# Altium PCB Shapeoko Mill.PcbDoc (part 2 of 2)
Units mil, origin at the board's own origin, x right, y up, seen from the top; angles counter-clockwise.
Board outline 6000 x 5000 mil, 2 copper layers (Top Layer, Bottom Layer); 145 components, 165 nets, 634 pads, 190 vias.
Unrouted connection lines stored in the file: 4.
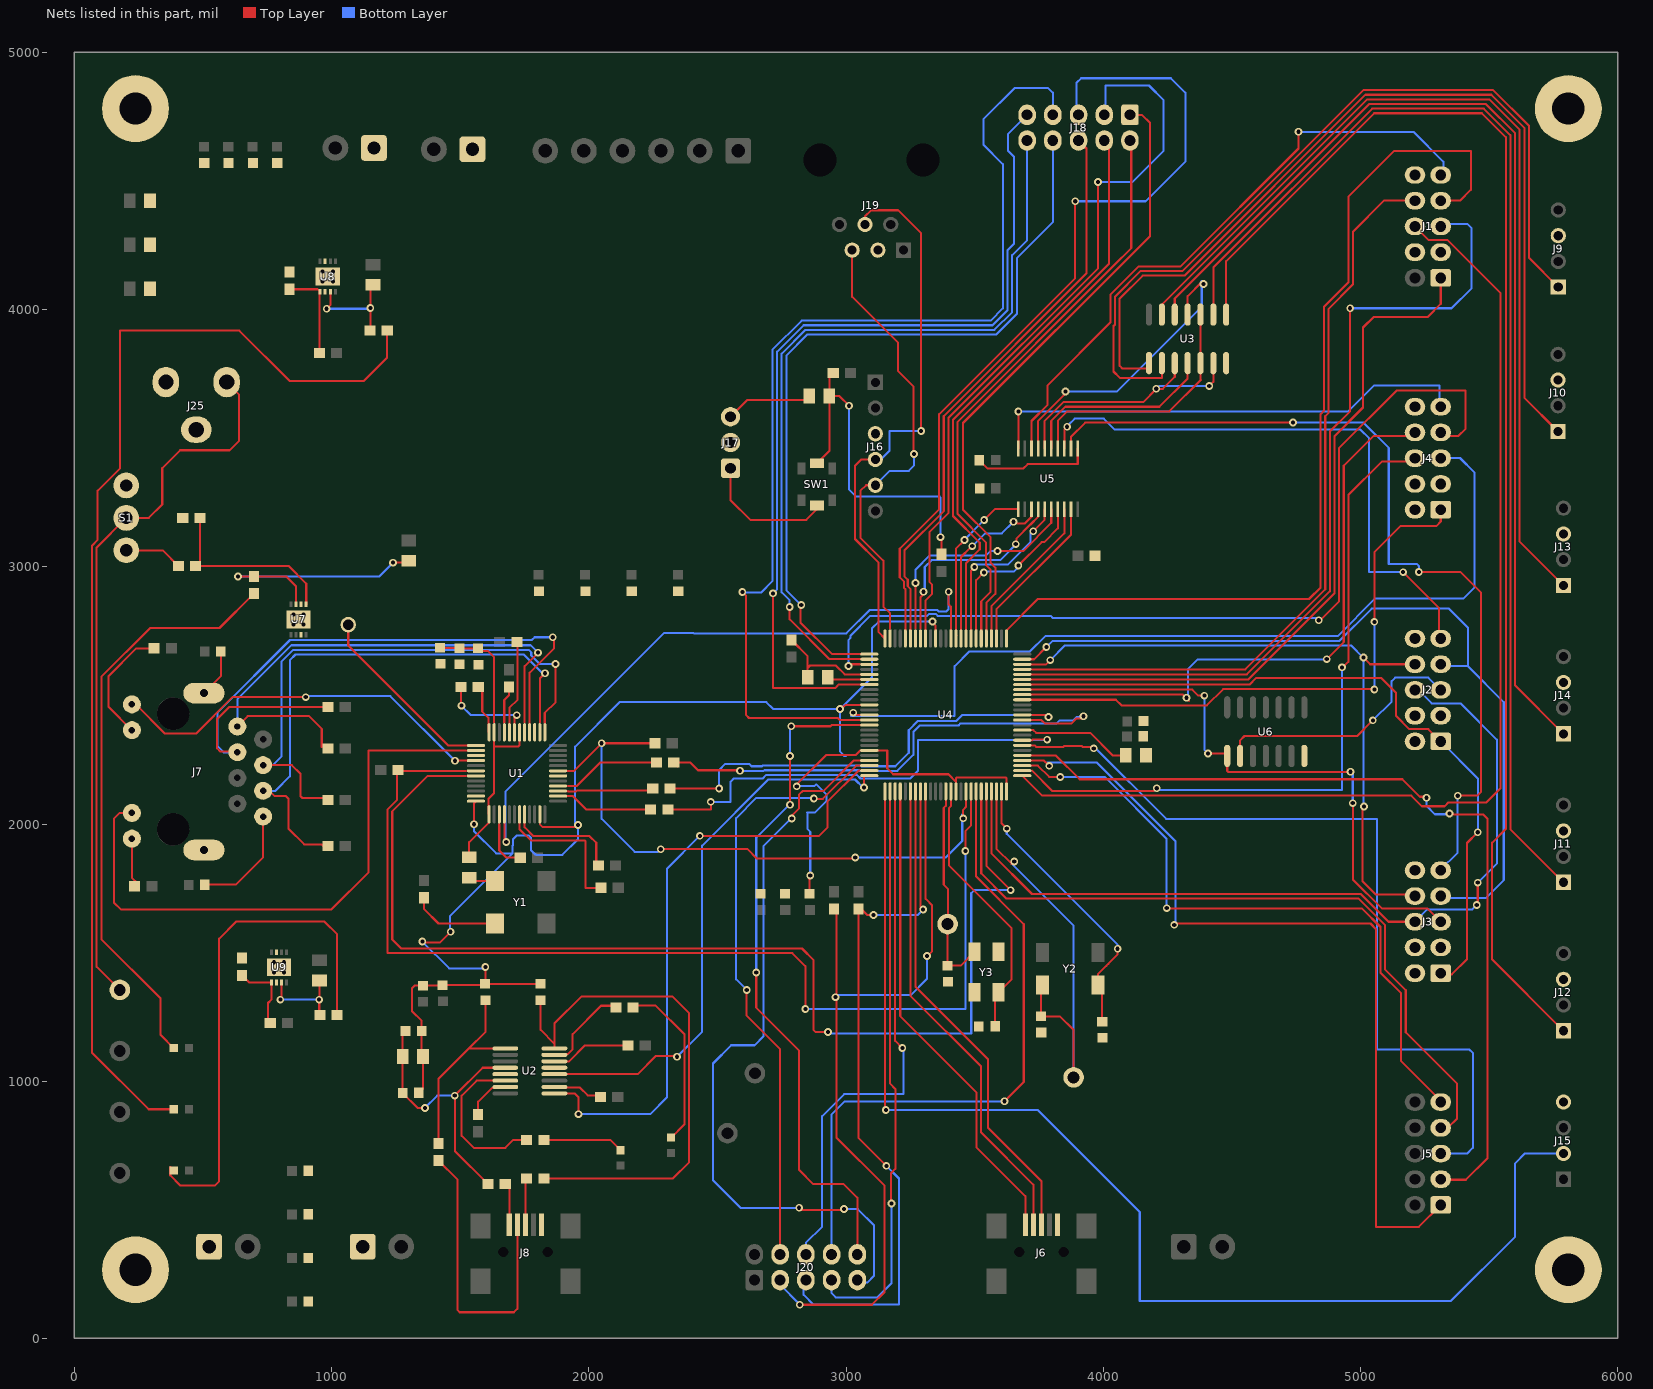
[diagram p2: the nets of this part, all layers, seen from the top]

## Via types
v1: diameter 30, hole 16, Top Layer to Bottom Layer, 190 vias

## Nets (pads, with @x,y where several pads share a name; then routed paths per layer and width w, separated by ;. In a path a pad name is that pad's centre, name@x,y a point inside that pad or via, vN(x,y) a via of type N, cw(c..) or ccw(c..) an arc to the next point about the centre after c; other vN are vias at no path point) (continued)
GND: C1.1 C2.1 C3.1 C4.1 C5.1 C6.1 C7.1 C8.1 C9.1 C10.1 C11.1 C12.1 C13.1 C14.1 C16.1 C18.2 C19.1 C20.1 C21.1 C22.1 C23.1 C24.1 C25.1 C26.1 C27.1 C28.1 C29.1 C30.1 C31.1 C33.1 C35.1 C37.1 C38.1 C39.1 C40.1 C41.1 C42.1 C43.1 C44.1 C45.1 J1.10 J2.10 J3.10 J4.10 J6.5 J7.8 J7.13 J7.14 J8.5 J9.3 J10.3 J11.3 J12.3 J13.3 J14.3 J15.4 J16.3 J17.2 J19.3 J23.1 J24.1 J25.2 J25.3 J26.1 J27.1 MH1.MH MH2.MH MH3.MH MH4.MH R12.1 R32.1 R37.1 R39.1 R41.1 S1.1 U1.6 U1.15 U1.19 U1.35 U1.36 U1.47 U2.5 U2.13 U3.7 U4.15 U4.36 U4.45 U4.65 U4.75 U5.11 U6.7 U7.3 U7.6 U7.9 U8.3 U8.6 U8.9 U9.3 U9.6 U9.9 Y1.2 Y3.2 Y3.4 | length 8400.1
  Top Layer w8: J7.13@504,2509 569.5,2574.5 C2.1@569.5,2671 ; C1.1@507.5,1764 628,1764 734,1870 J7.8@734,2029 ; C10.1@1339.5,955 1355.37,970.87 C8.1@1355.37,1096 1350.5,1100.87 C9.1@1350.5,1196 1350.5,1234.5 1313,1272 1313,1362 1322.5,1371.5 C11.1@1355,1371.5 1430,1371.5 C14.1@1432,1373.5 1592,1373.5 C13.1@1597,1378.5 ; v1(1353,1543) 1353,1542 1351,1540 1422,1540 v1(1463,1581) ; R12.1@1503.54,2533 1503.54,2461.46 v1(1505,2460) ; C4.1@1535,1791.63 1547.95,1778.68 Y1.2@1636,1778.68 ; v1(1554,1999) 1554,2081.18 U1.36@1561.55,2088.73 ; v1(1598,1444) 1598,1379.5 C13.1@1597,1378.5 ; U1.19@1711.16,2356.45 1711.16,2421.84 1710,2423 v1(1720,2423) ; 1809.58,1999.56 1821.02,1988.12 1950.12,1988.12 v1(1958,1996) ; C12.1@1812,1378.5 C13.1@1597,1378.5 ; v1(2808.5,2146.5) 2807,2148 2803,2148 2924,2269 3039,2269 3056.2,2286.2 U4.45@3090.76,2286.2 3160.3,2286.2 3160.3,2216.66 3183.48,2193.48 3398.52,2193.48 3427.37,2164.63 ; v1@2856,1787 2858.5,1784.5 C29.1@2858.5,1728.5 ; v1(2977,2447) 2977,2450 2983.46,2456.46 2991.46,2456.46 2998.37,2463.37 U4.36@3090.76,2463.37 ; v1@3341,2779 3348.63,2771.37 U4.15@3348.63,2721.24 ; U4.65@3427.37,2126.76 3427.37,2164.63 ; C18.2@3518.5,3414 3551.19,3381.31 3688.18,3381.31 3705.87,3399 3901,3399 3901,3459.38 U5.11@3900.32,3460.06 ; U4.75@3624.44,2126.76 3624.44,2178.56 3621.43,2181.57 3430.61,2181.57 3427.37,2178.33 3427.37,2164.63
  Bottom Layer w8: v1(1353,1543) 1457,1439 1593,1439 v1(1598,1444) ; v1(1463,1581) 1463,1576 1461,1574 1461,1643 1704,1886 ; v1(1505,2460) 1542,2423 v1(1720,2423) ; v1(1554,1999) 1554,1972 1640,1886 1704,1886 ; v1(2808.5,2146.5) 2810,2148 2878,2148 2884,2154 2925,2113 2925,2090 2879,2044 2849,2044 2849.5,2043.5 2849.5,1981.02 2861,1969.52 v1(2861,1800) ; 2999,2264 2994,2264 2977,2281 v1(2977,2447) ; v1(3336,2787) 3127,2787 3101,2761 3101,2571 v1(2977,2447) ; 1704,1886 1704,1916.02 1705.5,1917.52 1705.5,1940.5 1721,1956 1766,1956 1775.5,1946.5 1775.5,1898.02 1791.02,1882.5 1791.96,1882.5 1794.46,1880 1897,1880 1958,1941 v1(1958,1996) 1950,1996 1947,1993 1947,2301 2119.5,2473.5 2689.98,2473.5 2716.48,2447 v1(2977,2447)
  other v1: 776.32,1423.31 815.69,1423.31 776.32,1462.68 815.69,1462.68 852.31,2775.31 891.68,2775.31 852.31,2814.69 891.68,2814.69 965.63,4108.63 1005,4108.63 965.63,4148 1005,4148
GPIO1: J18.1 U4.5 | length 2462.6
  Top Layer w8: U4.5@3545.48,2721.24 3545.48,2860.02 3580.5,2895.04 3580.5,2996.43 3562,3014.93 3562,3114 3455,3221 3455,3559 4182,4286 4182,4725 4150,4757 J18.1@4104,4757
GPIO2: J18.2 U4.6 | length 2283.8
  Top Layer w8: U4.6@3525.8,2721.24 3525.8,2865.8 3562.5,2902.5 3562.5,2988.98 3544,3007.48 3544,3095 3434,3205 3434,3563.46 4040,4169.46 4040,4170 4109,4239 J18.2@4109,4657
GPIO3: J18.3 U4.17 | length 2929
  Top Layer w8: U4.17@3308.5,2721.24 3308.5,2868.07 3335,2894.57 3335,2930 3325,2940 3325,3135.63 3398,3208.63 3398,3578.37 3980,4160.37 v1(3980,4496)
  Bottom Layer w8: v1(3980,4496) 4114,4496 4235,4617 4235,4814 4178,4871 4009,4871 4009,4762 J18.3@4004,4757
GPIO4: J18.4 U4.9 | length 2259.4
  Top Layer w8: U4.9@3466.74,2721.24 3466.74,3014.74 3520,3068 3520,3093.54 3416,3197.54 3416,3570.91 4022,4176.91 4022,4639 J18.4@4004,4657
GPIO5: J18.5 U4.21 | length 3331.9
  Top Layer w8: U4.21@3230.52,2721.24 3230.52,2912.84 3225,2918.36 3225,2943.21 3209,2959.21 3209,3070.54 3362,3223.54 3362,3593.28 3891,4122.28 v1(3891,4421)
  Bottom Layer w8: v1(3891,4421) 4165,4421 4319,4575 4319,4843 4263,4899 3914,4899 3896,4881 3896,4765 J18.5@3904,4757
GPIO6: J18.6 U4.20 | length 2251.5
  Top Layer w8: U4.20@3250.2,2721.24 3250.2,2914.37 3240,2924.57 3240,2949.43 3227,2962.43 3227,3063.09 3380,3216.09 3380,3585.82 3935,4140.82 3935,4626 J18.6@3904,4657
GPIO7: J18.7 U4.39 | length 4151.3
  Top Layer w8: v1(2597,2902) 2612,2887 2612,2423 2623,2412 2968,2412 2975.68,2404.31 U4.39@3090.76,2404.31
  Bottom Layer w8: v1@2595,2900 2670,2900 2714,2944 2714,3843.37 2827.63,3957 3562,3957 3610,4005 3610,4565.5 3534,4641.5 3534,4740 3655,4861 3786,4861 3804,4843 J18.7@3804,4757
GPIO8: J18.8 U4.26 | length 3077.5
  Top Layer w8: v1(2826,2851) 2823,2848 2823,2783 2945.78,2660.22 U4.26@3090.76,2660.22
  Bottom Layer w8: v1(2826,2851) 2825.48,2851 2768,2908.48 2768,3821 2850,3903 3584.37,3903 3664,3982.63 3664,4200 3804,4340 J18.8@3804,4657
GPIO9: J18.9 U4.32 | length 3466.7
  Top Layer w8: v1(2716,2896.54) 2716,2530.39 2717.93,2528.46 2957.81,2528.46 2966.01,2536.66 2966.01,2537.06 2966.41,2537.06 2971.46,2542.11 3040.43,2542.11 ; 3040.32,2542 3040.43,2542.11 ; U4.32@3090.76,2542.11 3040.43,2542.11
  Bottom Layer w8: v1(2716,2896.54) 2732,2912.54 2732,3835.91 2835.09,3939 3569.46,3939 3628,3997.54 3628,4231 3653,4256 3653,4593.39 3630,4616.39 3630,4683 J18.9@3704,4757
GPIO10: J18.10 U4.27 | length 3073.1
  Top Layer w8: v1(2781,2844) 2781,2796 2936,2641 U4.27@3090.76,2641
  Bottom Layer w8: v1(2781,2844) 2781,2870.02 2750,2901.02 2750,3828.46 2842.54,3921 3576.91,3921 3646,3990.09 3646,4211 3704,4269 J18.10@3704,4657
I2C_SCL: J20.5 R29.1 U4.58 | length 2813.1
  Top Layer w8: J20.5@2844,210 J20.5@2844,227 ; v1(3107,1646) 3083.54,1646 3049,1680.54 3049,779 v1(3157,671) ; U4.58@3289.57,2126.76 3289.57,1669.43 3296,1663 3296,1664 v1(3300,1668)
  Bottom Layer w8: J20.5@2835.5,218.5 2835.5,169.5 2873,132 3206,132 3206,622 v1(3157,671) ; v1(3107,1646) 3278,1646 v1(3300,1668)
I2C_SDA: J20.3 R28.1 U4.59 | length 3183.7
  Top Layer w8: v1(2820,131) 3100.52,131 3150,180.48 3150,594 2963,781 R28.1@2963,1669.54 ; U4.59@3309.26,2126.76 3309.26,1708.74 3335,1683 3335,1505 3317,1487 v1(3315,1487)
  Bottom Layer w8: J20.3@2744,227 2744,209 v1@2819,134 ; v1@2820,128 v1(2820,131) ; v1@2954.5,1323.5 2966,1335 3251,1335 3315,1399 v1(3315,1487)
  other v1: 2959,1327
INT3/SCL1/RA14: R5.2 U1.7 U4.67 | length 2374.2
  Top Layer w8: U1.7@1880.45,2206.84 1942.84,2206.84 v1(2050,2314) R5.2@2257.54,2314 ; v1(2280,1902) 2617.5,1902 2654,1865.5 3024.5,1865.5 v1@3029,1870 ; v1@3455.25,2035.75 3455.25,2055.25 3466,2066 3466,2091
  Bottom Layer w8: v1(2050,2314) 2050,2020 2178,1892 2270,1892 v1(2280,1902) ; v1@3036,1869 3387,1869 3452,1934 3452,2037
  other v1: 3036,1870 3456,2022
LED_ACT: J7.11 U1.26 | length 2319
  Top Layer w8: J7.11@224,2043 176,2043 154,2021 154,1695 182,1667 998,1667 1144,1813 1144,2285 1522.98,2285 1523.56,2285.58
LED_LINK: J7.9 U1.28 | length 1556.5
  Top Layer w8: J7.9@224,2465 239.11,2465 352.11,2352 473.54,2352 614.54,2493 v1(900,2493) ; v1(1480,2246) 1480.21,2246.21 U1.28@1561.55,2246.21
  Bottom Layer w8: v1(900,2493) 896,2497 1229,2497 v1(1480,2246)
LED_SPEED: U1.27
LIMIT_INT: U3.4 U5.15 | length 765.1
  Top Layer w8: U5.15@3797.96,3460.06 3797.96,3567.42 3852.54,3622 4218,3622 4328,3732 U3.4@4328,3791.51
MDI_RN: J7.6 R3.1 U1.14 | length 2219.7
  Top Layer w8: J7.6@734,2129 736,2127 760,2127 779,2108 823,2108 832.7,2098.3 832.7,1982.3 894,1921 961,1921 967,1915 R3.1@986.54,1915 ; 1809.58,2394.44 1809.58,2565.58 v1(1830,2586)
  Bottom Layer w8: J7.6@734,2129 782,2129 838,2185 838,2637 860,2659 1747.07,2659 1820.07,2586 v1(1830,2586)
MDI_RP: J7.4 R4.1 U1.13 | length 2206.3
  Top Layer w8: J7.4@734,2229 845.54,2229 879.54,2195 879.54,2108.46 887,2101 973.54,2101 R4.1@981.54,2093 ; U1.13@1829.49,2356.45 1829.49,2394.22 1829,2394.71 1829,2432 1871,2474 v1(1871,2622)
  Bottom Layer w8: J7.4@734,2229 772,2229 806,2263 806,2632 851,2677 1766.54,2677 1776.5,2667.04 1776.5,2655.02 1809.52,2622 v1(1871,2622)
MDI_TN: J7.3 R2.1 U1.16 | length 2683.5
  Top Layer w8: J7.3@634,2279 631,2282 567,2282 555,2294 555,2408 602,2455 R2.1@966.54,2455 ; U1.16@1770.21,2356.45 1770.21,2588.21 1864,2682 1864,2723 1861,2726 v1(1860,2726)
  Bottom Layer w8: J7.3@634,2279 581,2279 556,2304 556,2432.91 838.57,2715.48 1778.98,2715.48 1789.5,2726 v1(1860,2726)
MDI_TP: J7.1 R1.1 U1.17 | length 2102.4
  Top Layer w8: J7.1@634,2379 674,2419 913,2419 962,2370 962,2300 ; 1750.53,2394.44 1750.53,2613.53 v1(1803,2666)
  Bottom Layer w8: J7.1@634,2379 634,2485.46 843.54,2695 1774,2695 v1(1803,2666)
NetC12_2: C12.2 R26.2 U2.8 | length 2052.9
  Top Layer w8: C12.2@1813,1315.5 1813,1199.94 1866.47,1146.47 ; R26.2@1825.46,622 2327,622 2390,685 2390,1265 2325,1330 1972,1330 1866.47,1224.47 U2.8@1866.47,1127.5
NetC13_2: C13.2 R25.2 U2.9 | length 773.5
  Top Layer w8: R25.2@1416,758.46 1416,1009 1534.5,1127.5 ; C13.2@1598,1315.5 1598,1191 1534.5,1127.5 ; U2.9@1675.53,1127.5 1534.5,1127.5
NetC15_1: C15.1 R27.1 R30.1 SW1.2 | length 1387.4
  Top Layer w8: SW1.2@2887,3401.69 2935.37,3450.06 C15.1@2935.37,3664 ; R27.1@2950.54,3753 2935.37,3737.83 C15.1@2935.37,3664 ; v1(3012,3626) 2974,3664 C15.1@2935.37,3664 ; v1(3367,3115) 3366,3114 3371,3109 R30.1@3371,3048.46
  Bottom Layer w8: v1(3012,3626) 3012,3300 3038.53,3273.47 3363.53,3273.47 3367,3270 v1(3367,3115)
NetC15_2: C15.2 J17.3 | length 339.2
  Top Layer w8: J17.3@2551,3583 2617,3649 2841.63,3649 C15.2@2856.63,3664
NetC16_2: C16.2 U4.85 | length 443
  Top Layer w8: U4.85@3685.24,2364.94 3728.06,2364.94 3739,2354 3949,2354 4036,2267 C16.2@4087.63,2267
NetC17_1: C17.1 U4.31 | length 165.2
  Top Layer w8: C17.1@2929.37,2571 2938.57,2561.8 U4.31@3090.76,2561.8
NetC17_2: C17.2 R31.1 U4.30 | length 428.7
  Top Layer w8: R31.1@2788,2715.46 2850.63,2652.83 2850.63,2606.63 ; C17.2@2850.63,2571 2850.63,2606.63 ; U4.30@3090.76,2581.48 2994.52,2581.48 2960,2616 2860,2616 2850.63,2606.63
NetC32_1: C32.1 R33.1 U7.7 | length 1001.3
  Top Layer w8: v1(636,2962) 636.46,2962.46 R33.1@698,2962.46 822.85,2962.46 862.16,2923.16 U7.7@862.16,2854.06 ; v1(1239,3016) 1292.37,3016 C32.1@1300,3023.63
  Bottom Layer w8: v1(636,2962) 1185,2962 v1(1239,3016)
NetC34_1: C34.1 R34.1 U8.7 | length 425.6
  Top Layer w8: v1(981,4003) 995.16,4017.16 U8.7@995.16,4069.26 ; R34.1@1151,3918 1151,4085.63 C34.1@1161.31,4095.94
  Bottom Layer w8: v1(981,4003) 1148,4003 v1(1151,4006)
NetC36_1: C36.1 R35.1 U9.7 | length 411.9
  Top Layer w8: v1(801,1317) 805.84,1321.84 U9.7@805.84,1383.94 ; v1(952,1317) 952,1259.54 953,1258.54 C36.1@953,1391.63
  Bottom Layer w8: v1(801,1317) v1(952,1317)
NetD1_2: D1.2 R22.2 | length 317.8
  Top Layer w8: R22.2@1834,771 2085,771 D1.2@2132.27,723.73
NetD2_2: D2.2 R24.2 | length 668.9
  Top Layer w8: R24.2@2172.46,1294 2260,1294 2372,1182 2372,832.53 D2.2@2320,780.53
NetD3_2: D3.2 R33.2 | length 2286.9
  Top Layer w8: D3.2@386.47,1129 335,1180.47 335,1322 105,1552 105,2572.46 294.54,2762 564.46,2762 R33.2@698,2895.54
NetD4_2: D4.2 R34.2 | length 4524.8
  Top Layer w8: D4.2@386.47,891 289,891 69,1111 69,3082.46 91,3104.46 91,3295.51 177,3381.51 177,3919 178,3918 642,3918 838,3722 1125,3722 1216.46,3813.46 R34.2@1216.46,3918
NetD5_2: D5.2 R35.2 | length 2029.4
  Top Layer w8: D5.2@386.47,653 373,666.47 373,634 413,594 546,594 563,611 563,1554 630,1621 972,1621 1021.46,1571.54 R35.2@1021.46,1257
NetJ7_10: J7.10 R6.1 | length 470
  Top Layer w8: J7.10@224,2365 133,2456 133,2575 241,2683 R6.1@310.54,2683
NetJ7_12: J7.12 R7.1 | length 170.6
  Top Layer w8: J7.12@224,1943 224,1791.54 237.54,1778
NetJ8_1: J8.1 R23.1 | length 162.8
  Top Layer w8: R23.1@1675.46,600 1691.01,584.46 J8.1@1691.01,443.61
NetJ8_2: J8.2 R25.1 | length 1181.7
  Top Layer w8: R25.1@1416,691.54 1490,617.54 1490,110 1498,102 1709,102 1722.5,115.5 J8.2@1722.5,443.61
NetJ8_3: J8.3 R26.1 | length 178.4
  Top Layer w8: J8.3@1754,443.61 R26.1@1754,622
NetJ15_2: J15.2 U4.51 | length 4788.7
  Top Layer w8: U4.51@3151.78,2126.76 3151.78,891.22 v1(3155,888)
  Bottom Layer w8: v1(3155,888) 3745.54,888 4142,491.54 4142,146 5352,146 5601,395 5601,681 5639,719 J15.2@5789,719
NetJ17_1: J17.1 SW1.1 | length 524.2
  Top Layer w8: J17.1@2551,3383 2551,3259 2628,3182 2846,3182 2887,3223 SW1.1@2887,3238.31
NetJ25_1: J25.1 S1.2 TP18.1 | length 2813.9
  Top Layer w8: TP18.1@177,1355 87,1445 87,3075 S1.2@202,3190 290,3190 342,3242 342,3383 412,3453 604,3453 641,3490 641,3669.37 J25.1@592.37,3718
NetR8_1: R8.1 U4.88 | length 1784.5
  Top Layer w8: R8.1@2315.46,2138 v1(2507,2138) v1@2509.61,2138 ; 3723.24,2424 3785.5,2424 3787,2425.5 v1(3787,2416)
  Bottom Layer w8: v1(2507,2138) 2507,2210 2530.5,2233.5 2623.5,2233.5 2632.44,2224.56 2672.74,2224.56 2675.18,2227 3057.37,2227 3059.8,2224.56 3192.06,2224.56 3244,2276.5 3244,2365 3280,2401 3429.71,2401 3452.71,2424 3791,2424 v1@3798.5,2416.5
NetR8_2: R8.2 U1.3 | length 335.1
  Top Layer w8: 1918.44,2128.1 1919.54,2127 1951,2127 1953.79,2129.79 2240.32,2129.79 R8.2@2248.54,2138
NetR9_1: R9.1 U4.87 | length 1997.8
  Top Layer w8: R9.1@2345.46,2224 R9.1@2330.46,2239 2394.54,2239 2424.54,2209 2578.5,2209 2588,2199.5 v1(2588,2207) ; 3723.24,2404.31 3723.55,2404 3760,2404 3774,2390 3875,2390 3895,2410 v1@3919,2410
  Bottom Layer w8: v1@2588,2199.5 v1(2588,2207) ; v1@2588,2206.46 2680.09,2206.46 2682.63,2209 3049.91,2209 3052.46,2206.46 3199.41,2206.46 3262,2269.04 3262,2357.54 3287.46,2383 3437.16,2383 3444.16,2390 3818,2390 3831,2403 3884,2403 3897,2416 3908,2416 v1@3920,2428
  other v1: 3923,2419
NetR9_2: R9.2 U1.4 | length 382.9
  Top Layer w8: 1918.44,2147.79 1952.79,2147.79 2044,2239 R9.2@2263.54,2239
NetR10_1: R10.1 U4.83 | length 1790.6
  Top Layer w8: R10.1@2307.46,2056 2476,2056 ; 2476,2059.5 v1@2476,2086 ; 3723.24,2325.57 3725.66,2328 v1(3782,2328)
  Bottom Layer w8: v1(2474,2086) 2491,2086 2491.25,2086.25 2551.25,2086.25 2551.25,2164.25 2564,2177 2676.09,2177 2690.09,2191 3042.46,2191 3056.46,2177 3249.91,2177 3280,2207.09 3280,2326 3781,2326 3782,2327 v1(3782,2328)
NetR10_2: R10.2 U1.2 | length 381.8
  Top Layer w8: U1.2@1880.45,2108.42 1938.58,2108.42 1991,2056 R10.2@2240.54,2056
NetR11_2: R11.2 U1.30 U4.68 | length 4232.7
  Top Layer w8: R11.2@1259,2205 1255,2201 1255,2093.77 1218,2056.77 1218,1498 2791,1498 2842,1447 v1(2842,1281) ; R11.2@1265,2206.84 1523.56,2206.84 ; v1(3464,1895) 3464,1972 3486.43,1994.43 3486.43,2088.76
  Bottom Layer w8: v1(2842,1281) 3464,1281.02 v1(3464,1895)
NetR12_2: R12.2 U1.24 | length 184.1
  Top Layer w8: R12.2@1586,2529.54 1586,2437 1610,2413 1610,2358.96 U1.24@1612.51,2356.45
NetR13_2: R13.2 U1.39 | length 195.7
  Top Layer w8: 1652.1,1999.56 1652,1999.46 1652,1897 1680,1869 R13.2@1733.54,1869
NetR14_2: R14.2 U1.43 | length 575.7
  Top Layer w8: U1.43@1730.84,2037.55 1730.84,1980.16 1776,1935 1790.52,1935 1791.02,1935.5 1984.98,1935.5 1988,1932.48 1988,1751 R14.2@2047.54,1751
NetR15_2: R15.2 U1.44 | length 446.6
  Top Layer w8: U1.44@1750.53,2037.55 1750.53,1987.47 1784.5,1953.5 2002.5,1953.5 2029,1927 R15.2@2029,1834
NetR16_1: R16.1 Y1.3 | length 343.6
  Top Layer w8: R16.1@1360,1713.54 1360,1669 1415.68,1613.32 Y1.3@1636,1613.32
NetR17_1: R17.1 U1.21 | length 145.8
  Top Layer w8: 1671.79,2394.44 1671.54,2394.69 1671.54,2482 1690,2500.46 R17.1@1690,2532.54
NetR18_1: R18.1 U1.20 | length 365.2
  Top Layer w8: U1.20@1691.47,2356.45 1691.47,2451.47 1723.69,2483.69 1723.69,2703.78 R18.1@1720.46,2707
NetR19_1: R19.1 U2.15 | length 179
  Top Layer w8: R19.1@1570,870.46 1570,920.23 1624.14,974.37 1672.4,974.37 U2.15@1675.53,977.5
NetR20_1: R20.1 U2.6 | length 312.2
  Top Layer w8: U2.6@1866.97,1077 U2.6@1866.47,1077.5 1923.5,1077.5 1985,1139 R20.1@2152.54,1139
NetR21_1: R21.1 U2.2 | length 186
  Top Layer w8: U2.2@1866.47,977.5 1868.97,975 1966.07,975 1996.07,945 R21.1@2039,945
NetR22_1: R22.1 U2.14 | length 634.6
  Top Layer w8: U2.14@1675.53,1002.5 1564.5,1002.5 1506,944 1506,788 1553,741 1676,741 1707,772 R22.1@1758.54,772
NetR24_1: R24.1 U2.7 | length 352.3
  Top Layer w8: U2.7@1866.47,1102.5 1869.6,1105.63 1917.86,1105.63 1937,1124.77 1937,1183 2047.46,1293.46 R24.1@2105.54,1293.46
NetR36_1: R36.1 S1.3 | length 227.8
  Top Layer w8: S1.3@202,3064 343.54,3064 R36.1@404.54,3003
NetR36_2: R36.2 R37.2 U7.5 | length 733
  Top Layer w8: R37.2@488.46,3190 488.46,3020 R36.2@471.46,3003 833,3003 901.75,2934.25 U7.5@901.75,2854.06
NetR38_2: R38.2 R39.2 U8.5 | length 362.7
  Top Layer w8: R39.2@836.31,4078.85 945.98,4078.85 955.57,4069.26 952.54,4066.23 R38.2@952.54,3831
NetR40_2: R40.2 R41.2 U9.5 | length 292.6
  Top Layer w8: R41.2@652,1411.54 679.59,1383.94 766.25,1383.94 766.25,1317.25 753,1304 753,1234.54 R40.2@761.54,1226
NetTP5_1: TP5.1 U1.25 | length 738.9
  Top Layer w8: TP5.1@1065,2775 1065,2694 1454,2305 1523.29,2305 1523.78,2305.49 U1.25@1561.55,2305.49
NetU1_31: U1.31 U4.71 | length 4522.3
  Top Layer w8: 1523.56,2187.16 1373.84,2187.16 1236,2049.31 1236,1551 1271,1516 2829,1516 2874.5,1470.5 2874.5,1198.5 2882,1191 v1(2930,1191) ; U4.71@3545.48,2126.76 3545.48,1837.52 v1(3640,1743)
  Bottom Layer w8: v1@2936,1186 3487,1186 3487,1731 3499,1743 v1(3640,1743)
NetU1_40: U1.40 U4.12 | length 2588.5
  Top Layer w8: U1.40@1671.79,2037.55 1671.79,1932.21 1674,1930 v1(1679,1930) ; v1(3399,2903) 3399,2853.37 3407.68,2844.69 U4.12@3407.68,2721.24
  Bottom Layer w8: v1(1679,1930) 1676,1930 1676,2126 2293,2743 2406.54,2743 2408.54,2741 3001.54,2741 3092.54,2832 3354.64,2832 3360.64,2826 3389,2826 3399,2836 v1(3399,2903)
NetU2_1: U2.1 U4.49 | length 2429.5
  Top Layer w8: U2.1@1866.47,952.5 1945.5,952.5 1960,938 v1(1960,872) ; v1@2432,1953 2894.48,1953 2927.62,1986.14 2927.62,2086.62 3048.46,2207.46 U4.49@3090.76,2207.46
  Bottom Layer w8: v1(1960,872) 2239,872 2304,937 2304,1826 v1(2432,1954)
NetU2_4: U2.4 U4.50 | length 2160.9
  Top Layer w8: U2.4@1866.47,1027.5 2190.5,1027.5 2261,1098 2343,1098 v1(2343,1095) ; v1(3069.76,2142) U4.50@3069.76,2186.56
  Bottom Layer w8: v1(2343,1095) 2440.5,1192.5 2440.5,1915.96 2697.54,2173 3035,2173 v1@3067,2141
OSC1: C21.2 TP11.1 U4.63 Y3.1 | length 813.4
  Top Layer w8: U4.63@3388,2126.76 3388,2071 3380,2063 3380,1764 3396,1748 TP11.1@3396,1594 ; TP11.1@3395,1594 C21.2@3395,1449.5 3445.49,1449.5 Y3.1@3498.99,1503
OSC2: C22.2 U4.64 Y3.3 | length 1042.1
  Top Layer w8: U4.64@3407.68,2126.76 3407.68,2069.69 3401,2063 3401,1838 3643,1596 3643,1395.03 Y3.3@3593.49,1345.52 3579.5,1331.53 C22.2@3579.5,1214
PFOUT: C3.2 C4.2 C5.2 C6.2 U1.18 U1.23 U1.37 | length 1158.9
  Top Layer w8: C6.2@1422,2685.5 1424,2683.5 C5.2@1497,2683.5 1498,2682.5 C3.2@1570,2682.5 1580.5,2672 1609,2672 1632.42,2648.58 1632.42,2394.44 ; C4.2@1535,1870.37 1535,1929 1612.73,2006.73 U1.37@1612.73,2037.55 ; U1.37@1612.51,2037.55 1611,2039.06 1611,2099 1632.42,2120.42 1632.42,2299 ; U1.23@1632.42,2356.45 1632.42,2299 ; U1.18@1730.84,2356.45 1730.84,2306.84 1725,2301 1634.42,2301 1632.42,2299
PGC: J16.5 J19.5 U4.24 | length 1770.5
  Top Layer w8: J19.5@3024,4230.76 3024,4049 3202.5,3870.5 3202.5,3760.5 3262,3701 3262,3438 v1(3264,3438) ; J16.5@3114,3317 3078,3317 3056,3295 3056,3113 3145,3024 3145,2845.28 3171.46,2818.81 3171.46,2759.24
  Bottom Layer w8: J16.5@3114,3317 3170,3373 3244,3373 3264,3393 v1(3264,3438)
PGD: J16.4 J19.4 U4.25 | length 2142.6
  Top Layer w8: J19.4@3074,4330.76 3074,4362 3098,4386 3203,4386 3292,4297 v1(3292,3528) ; J16.4@3114,3417 3060,3417 3035,3392 3035,3108 3127,3016 3127,2746.02 U4.25@3151.78,2721.24
  Bottom Layer w8: J16.4@3114,3417 3135,3417 3169,3451 3169,3528 v1(3292,3528)
SOSC1: C23.2 TP12.1 U4.73 Y2.1 | length 1693.1
  Top Layer w8: U4.73@3584.85,2126.76 3584.85,1904.15 v1@3644,1845 ; Y2.1@3763.73,1374.01 3758,1368.28 C23.2@3758,1252.5 3831.5,1252.5 3885,1198.99 TP12.1@3885,1015
  Bottom Layer w8: v1@3644,1845 3885,1604 TP12.1@3885,1015
  other v1: 3654,1854
SOSC2: C20.2 U4.74 Y2.2 | length 1082.2
  Top Layer w8: 3604.54,2088.76 3604.54,2002.46 v1(3625,1982) ; C20.2@3996,1231.5 3996,1358.28 Y2.2@3980.27,1374.01 3980.27,1417.27 4011.59,1448.59 4011.66,1448.59 4019.86,1456.79 4019.86,1456.86 4056,1493 v1(4056,1515)
  Bottom Layer w8: v1(3625,1982) 3625,1962 4056,1531 v1(4056,1515)
SP_DIR: J5.1 U4.79 | length 3270.4
  Top Layer w8: U4.79@3719,2247 3769,2247 v1(3790,2226) ; v1@4276,1613 5039,1613 5060,1592 5060,434 5227,434 J5.1@5312,519
  Bottom Layer w8: 3782,2239 3975,2239 4281,1933 4281,1613 v1(4276,1608)
SP_ENA: J5.3 U4.80 | length 3503.7
  Top Layer w8: U4.80@3685.24,2266.52 3685.76,2266 3816.54,2266 3908.54,2174 5163,2174 5231,2106 5266,2106 5262,2102 v1(5257,2102) ; J5.3@5285.88,619 J5.3@5312,619 ; J5.3@5320,617 5410,617 5494,701 5494,2021 5478,2037 5360,2037 v1@5348,2049
  Bottom Layer w8: v1(5257,2102) 5257,2070 5289,2038 v1@5345,2038
  other v1: 5346,2041
SP_SPEED: J5.9 U4.78 | length 2583.6
  Top Layer w8: U4.78@3685.24,2227.15 3745.85,2227.15 3790,2183 v1(3833,2183) ; v1@4246,1671 5006.46,1671 5078,1599.46 5078,1422 5158,1342 5158,1078 5310,926 J5.9@5310,919
  Bottom Layer w8: v1(3833,2183) 4005.54,2183 4246,1942.54 v1@4246,1675.81
  other v1: 4247,1673
SP_TACH: J5.7 U4.70 | length 2930.9
  Top Layer w8: U4.70@3525.8,2126.76 3525.8,1808.2 3624,1710 4992.91,1710 5096,1606.91 5096,1434 5176,1354 5176,1190 5376,990 5376,855 5340,819 J5.7@5300,819
SP_VCC: J5.5 U4.82 | length 3295.2
  Top Layer w8: U4.82@3685.24,2305.89 3733,2305.89 3738.89,2300 3845,2300 3847.44,2302.44 3918,2302.44 3920.44,2300 3959,2300 v1@3969.5,2289.5
  Bottom Layer w8: v1@3962,2297 3967.91,2297 4245,2019.91 5065,2019.91 5065,1123 5424,1123 5437,1110 5437,741 5415,719 J5.5@5305,719
  other v1: 3963,2294
SPI_CLK: J20.4 U4.48 | length 2378.8
  Top Layer w8: v1(2614,1355) 2614,1255 2744,1125 J20.4@2744,327 ; v1@2875,2110 2887,2098 2910,2098 3039.15,2227.15 U4.48@3090.76,2227.15
  Bottom Layer w8: v1(2614,1355) 2573,1396 2573,2023 2651.5,2101.5 2792.98,2101.5 2793.48,2101 v1@2878,2101
  other v1: 2875,2099
SPI_MISO: J20.7 U4.52 | length 2241.5
  Top Layer w8: U4.52@3171.46,2126.76 3171.46,990.54 3192,970 3192,659.46 3175,642.46 3175,527 v1(3177,525)
  Bottom Layer w8: J20.7@2944,227 2944,176 2960,160 3122,160 3177,215 v1(3177,525)
SPI_MOSI: J20.6 U4.53 | length 2112.4
  Top Layer w8: U4.53@3191.15,2126.76 3191.15,1156.85 v1(3219,1129)
  Bottom Layer w8: J20.6@2844,327 2844,372 2907,435 2907,864 2993,950 3223.5,950 3223.5,1124.5 v1@3214,1134
SPI_S\S\1\: J20.8 U4.69 | length 2549.5
  Top Layer w8: U4.69@3506.11,2126.76 3506.11,1795.89 3691,1611 3691,997 v1(3616,922)
  Bottom Layer w8: J20.8@2944,327 2944,871 2995,922 v1(3616,922)
SPI_S\S\2\: J20.9 U4.47 | length 3061.1
  Top Layer w8: v1(2789,2021) 2789,2032 2818,2061 2818,2115 2831,2128 2912,2128 3030.83,2246.83 U4.47@3090.76,2246.83 ; v1(2818,508) 2827,499 2992,499 v1(2992,503) ; J20.9@3041,238 3073,238 J20.9@3053,218
  Bottom Layer w8: v1@2787.5,2022.5 2680,1915 2680,1608 2679,1607 2679,1174 2645,1140 2554,1140 2483,1069 2483,615 2590,508 v1(2818,508) ; v1(2992,503) 3046,503 3109,440 3109,244 3082,217 3054,217 J20.9@3044,227
SPI_S\S\3\: J20.10 U4.40 | length 2659.9
  Top Layer w8: v1(2651,1423) 2651,1286 2818,1119 2818,655 2873,600 2991,600 3044,547 J20.10@3044,327 ; v1(2782,2075) v1(2782,2264) 2782,2270 v1@2784,2272 ; v1(2787,2380) 2940,2380 ; 2940,2381 2944,2385 2957,2385 U4.40@3090.76,2384.63
  Bottom Layer w8: v1(2651,1423) 2651,1947 v1@2783,2079 ; v1(2782,2264) 2782,2375 v1(2787,2380)
USB_D+: J6.3 U4.57 | length 1887.7
  Top Layer w8: U4.57@3269.89,2126.76 3269.89,1368.11 3552,1086 3552,819 3760,611 J6.3@3760,442.11
USB_D-: J6.2 U4.56 | length 1895.9
  Top Layer w8: U4.56@3250.2,2126.76 3250.2,1332.8 3525,1058 3525,801 3728.5,597.5 J6.2@3728.5,429
VBUS: J6.1 U4.54 | length 1886
  Top Layer w8: U4.54@3210.83,2126.76 3210.83,1253.17 3507,957 3507,743 3697.01,552.99 J6.1@3697.01,442.11
VCC: C8.2 C9.2 C10.2 R23.2 U2.12 | length 1129.3
  Top Layer w8: C9.2@1287.5,1195 1276.5,1184 C10.2@1276.5,954 1334.5,896 v1(1363,896) ; v1@1480,944 1480,728.54 R23.2@1608.54,600 ; v1@1480,945 1587.5,1052.5 U2.12@1675.53,1052.5
  Bottom Layer w8: v1(1363,896) 1411,944 v1(1479,944)
X_DIR: J1.5 U4.96 | length 3331.2
  Top Layer w8: U4.96@3685.24,2581.48 4557.94,2581.48 4881,2904.54 4881,3526 4960,3605 v1(4960,4005)
  Bottom Layer w8: v1(4960,4005) 5354,4005 5432,4083 5432,4316 5415,4333 5322,4333 J1.5@5312,4323
X_ENA: J1.1 U4.95 | length 2872.6
  Top Layer w8: U4.95@3685.24,2561.8 4563.71,2561.8 4899,2897.09 4899,3508 5010,3619 5010,3930 5051,3971 5261,3971 5312,4022 J1.1@5312,4123
X_HM: J1.9 U5.18 | length 2427.5
  Top Layer w8: U5.18@3721.19,3460.06 3721,3460.24 3721,3566.82 3784,3629.82 3784,3705.4 4028,3949.4 4028,4057.92 4138.09,4168 4301,4168 4759,4626 v1(4759,4691)
  Bottom Layer w8: v1(4759,4691) 5206,4691 5322,4575 J1.9@5322,4515
X_HOME: U4.10 U5.3 | length 671.2
  Top Layer w8: U4.10@3447.06,2721.24 3447.06,3038.06 v1@3483,3074 ; v1(3651,3175) 3667,3169 3696,3169 3721.19,3194.19 U5.3@3721.19,3223.83
  Bottom Layer w8: v1@3486.52,3072 v1@3487.5,3072 ; v1@3496.77,3085.77 3540.88,3129.88 3605.88,3129.88 v1(3651,3175)
  other v1: 3491,3080
X_LIM: U4.8 U5.5 | length 703.6
  Top Layer w8: U4.8@3486.43,2721.24 3486.43,2985.43 3492,2991 3502,2991 3499,2994 v1(3499,2999) ; v1(3728,3138) 3772.37,3182.37 U5.5@3772.37,3223.83
  Bottom Layer w8: v1@3501.5,2990.5 3501.5,3001.5 3508,3008 3629,3008 3717,3096 3717,3130 v1@3723,3136
X_LIMIT: U3.3 U3.6 U5.16 | length 1040.7
  Top Layer w8: U5.16@3772.37,3460.06 3772.37,3567.28 3845.09,3640 4155,3640 v1@4205,3690 ; v1@4206.5,3691.5 4231.5,3691.5 4278,3738 U3.3@4278,3791.51 ; v1(4412,3703) 4428,3719 U3.6@4428,3791.51
  Bottom Layer w8: v1(4206,3692) 4217,3703 v1(4412,3703)
X_MAX: J9.1 U3.2 | length 3222.7
  Top Layer w8: U3.2@4228,3791.51 4228,3734.2 4064.8,3734.2 4040,3759 4040,3935.94 4046,3941.95 4046,4050.46 4145.54,4150 4308.46,4150 5011.46,4853 5515.91,4853 5655,4713.91 5655,4201 J9.1@5769,4087
X_MIN: J10.1 U3.1 | length 3572.6
  Top Layer w8: U3.1@4178,3777 4171,3770 4075,3770 4064,3781 4064,4043 4153,4132 4315.91,4132 5018.91,4835 5508.46,4835 5637,4706.46 5637,3656.83 J10.1@5768,3525.83
X_MS1: J1.8 U4.97 | length 2995
  Top Layer w8: 3723.24,2601.17 4552.17,2601.17 4863,2912 4863,3585.54 4876,3598.54 4876,4002.54 4971,4097.54 4971,4303 5091,4423 J1.8@5212,4423
X_MS2: J1.7 U4.1 | length 3720.2
  Top Layer w8: U4.1@3624.44,2721.24 3624.44,2752.9 3746.04,2874.5 4800.04,2874.5 4845,2919.46 4845,3593 4858,3606 4858,4010 4953,4105 4953,4439 5130,4616 5429,4616 5429,4465 5387,4423 J1.7@5312,4423
X_RST: J1.4
X_SLP: J1.3
X_STEP: J1.6 U4.76 | length 4302.3
  Top Layer w8: U4.76@3685.24,2187.78 3763.02,2110 5198,2110 5239,2069 5327,2069 5341.5,2083.5 5489.5,2083.5 5544,2138 5544,4064.88 5337.88,4271 5264,4271 J1.6@5212,4323
XY_LIM: U4.19 U5.6 | length 921.8
  Top Layer w8: 3269.89,2759.24 3269.89,2922.89 3277,2930 v1(3270,2937) ; v1@3589,3053 v1(3589,3061) 3688.52,3061 3797.96,3170.44 U5.6@3797.96,3223.83
  Bottom Layer w8: v1@3277,2930 v1(3270,2937) 3270,2988.46 3325.54,3044 3545,3044 3563,3062 3580,3062 3589,3053 v1(3589,3061)
Y1_5V: J3.2
Y1_DIR: J3.5 U4.93 U6.1 | length 2398
  Top Layer w8: U4.93@3685.24,2522.43 4346.57,2522.43 4370,2499 v1(4393,2499) ; v1(4407,2274) 4472.51,2274 U6.1@4482,2264.51 4482,2206 4485,2203 v1(4961,2203) ; v1(4970,2081) 4971,2080 4971,1784 5083,1672 5260,1672 J3.5@5312,1620
  Bottom Layer w8: v1(4393,2499) 4393,2288 v1(4407,2274) ; v1(4961,2203) 4970,2194 v1(4970,2081)
Y1_ENA: J2.1 J3.1 U4.94 | length 2854.4
  Top Layer w8: U4.94@3685.24,2542.11 4569.48,2542.11 4595.37,2568 5080,2568 5137.96,2510.04 5137.96,2421.16 5190.12,2369 5264,2369 J2.1@5312,2321 ; J2.1@5305,2341 J2.1@5313,2333 ; J3.1@5312.5,1415.5 5355.5,1415.5 5414,1474 5414,1926 v1(5456,1968)
  Bottom Layer w8: J2.1@5312,2321 5457,2176 v1@5457,1967
Y1_HM: J3.9 U5.12 | length 3405.2
  Top Layer w8: U5.12@3874.73,3460.06 3874.73,3504.73 3930,3560 4737,3560 v1(4738,3561) ; v1(5227,2980) 5388,2980 5469,2899 5469,2125 5454,2110 v1(5378,2110)
  Bottom Layer w8: v1(4738,3561) 5011,3561 5110,3462 5110,3010 5220,3010 5227,3003 v1(5227,2980) ; J3.9@5308.5,1819.5 5378,1889 v1(5378,2110)
Y1_HOME: U4.3 U5.9 | length 622.7
  Top Layer w8: U4.3@3584.85,2721.24 3584.85,2835.33 3874.73,3125.21 U5.9@3874.73,3223.83
Y1_MS1: J2.8 J3.8 U4.98 | length 2687.6
  Top Layer w8: U4.98@3685.24,2620.85 3777.85,2620.85 v1(3794,2637) ; v1(5012,2647) 5038,2621 J2.8@5212,2621 ; v1(5014,2068) 5008,2062 5008,1777 5058.5,1726.5 5205.5,1726.5 J3.8@5212,1720
  Bottom Layer w8: v1(3794,2637) 3851,2694 4964,2694 5011.5,2646.5 5011.5,2070.5 v1(5014,2068)
Y1_MS2: J2.7 J3.7 U4.99 | length 3276.2
  Top Layer w8: U4.99@3685.24,2640.54 3731.54,2640.54 v1(3779,2688)
  Bottom Layer w8: v1(3779,2688) 3803,2712 4918.46,2712 5043.46,2837 5344,2837 5418,2763 5418,2617 ; J3.7@5277,1712 5487,1712 5557,1782 5557,2474 5416,2615 J2.7@5331,2615
Y1_RST: J3.4
Y1_SLP: J3.3
Y1_STEP: J2.6 J3.6 U4.72 | length 3366.2
  Top Layer w8: U4.72@3565.17,2126.76 3565.17,1885.83 3723,1728 5001,1728 5109,1620 J3.6@5212,1620 J3.6@5202,1610 ; v1@5455,1685 5456,1686 v1(5456,1772)
  Bottom Layer w8: J2.6@5205,2541 5277,2469 5389,2469 5530,2328 5530,1846 v1(5456,1772) ; J3.6@5212,1620 5260,1668 5435,1668 v1(5452,1685)
Y2_5V: J2.2
Y2_DIR: J2.5 U6.2 | length 1007.7
  Top Layer w8: U6.2@4532,2264.51 4532,2325 4549,2342 4987,2342 v1(5048,2403)
  Bottom Layer w8: v1(5048,2403) 5121,2476 5121,2555 5135,2569 5264,2569 J2.5@5312,2521
Y2_HM: J2.9 U5.13 | length 2249.8
  Top Layer w8: U5.13@3849.14,3460.06 3849.14,3533.69 v1(3859.73,3544.27) ; v1(5166,2979) 5305,2840 J2.9@5305,2741
  Bottom Layer w8: v1@3863,3550 3889,3576 4002,3576 4045,3533 5000,3533 5034,3499 5034,2979 v1(5166,2979)
Y2_HOME: U4.4 U5.8 | length 620.2
  Top Layer w8: U4.4@3565.17,2721.24 3565.17,2846.17 3849.14,3130.14 U5.8@3849.14,3223.83
Y2_RST: J2.4
Y2_SLP: J2.3
Y_LIM: U4.7 U5.7 | length 708.1
  Top Layer w8: U4.7@3506.11,2721.24 3506.11,2948.11 v1(3536,2978) ; v1(3670,3005) 3761,3096 3770,3096 3823.55,3149.55 U5.7@3823.55,3223.83
  Bottom Layer w8: v1@3536,2967.52 3549.48,2981 3652,2981 v1@3673,3002
Y_LIMIT: U3.5 U3.10 U5.14 | length 983.5
  Top Layer w8: U5.14@3823.55,3460.06 3823.55,3567.55 3860,3604 4257,3604 4379,3726 4378,3727 U3.5@4378,3791.51 U3.10@4378,3980.49
Y_MAX: J11.1 U3.9 | length 4626.1
  Top Layer w8: U3.9@4428,3980.49 4428,4163.46 5045.54,4781 5479.46,4781 5583,4677.46 5583,1979.33 J11.1@5789,1773.33
Y_MIN: J12.1 U3.8 | length 5181.7
  Top Layer w8: U3.8@4478,3980.49 4478,4188 5053,4763 5472,4763 5565,4670 5565,1980.46 5512,1927.46 5512,1473.17 J12.1@5789,1196.17
Z_5V: J4.2
Z_DIR: J4.5 U4.38 | length 3452.9
  Top Layer w8: v1@3019,2431 3019,2427 3022,2424 U4.38@3090.76,2424
  Bottom Layer w8: v1@3019,2431 3019,2419 3422.25,2419 3422.25,2613.25 3480,2671 3715.46,2671 3774.96,2730.5 4911.5,2730.5 5058,2877 5401,2877 5443,2919 5443,3367 5387,3423 5315,3423 J4.5@5301,3409
  other v1: 3028,2433
Z_ENA: J4.1 U4.91 | length 2291.7
  Top Layer w8: U4.91@3685.24,2483.06 4048.94,2483.06 4071,2461 4403,2461 4466,2524 5053,2524 v1(5054,2523) ; v1(5054,2786) 5054,3057 5155,3158 5294,3158 5312,3176 J4.1@5312,3222
  Bottom Layer w8: v1(5054,2523) v1(5054,2786)
Z_HM: J4.9 U5.20 | length 1921.3
  Top Layer w8: U5.20@3670.01,3460.06 v1(3670,3604)
  Bottom Layer w8: v1(3670,3604) 4953,3604 5054,3705 5307,3705 5307,3615 J4.9@5301,3609
Z_HOME: U4.11 U5.1 | length 644.4
  Top Layer w8: U4.11@3429,2732 3427.37,2733.63 3427.37,3070.37 v1(3461,3104) ; v1(3537,3182) 3578.83,3223.83 U5.1@3670.01,3223.83
  Bottom Layer w8: v1@3461,3106 v1(3537,3182)
Z_LIM: U4.18 U5.4 | length 828.6
  Top Layer w8: 3289.57,2759.24 3289.57,2881.43 3311.15,2903 v1(3301,2903) ; v1(3660,3088) 3662,3088 3662,3109.48 3717.02,3164.5 3717.09,3164.5 3746.78,3194.19 U5.4@3746.78,3223.83
  Bottom Layer w8: v1@3306.07,2897.93 3306.07,2999.07 3333,3026 3599.48,3026 3660,3086.52 v1(3660,3088)
Z_LIMIT: U3.11 U5.17 | length 1214.7
  Top Layer w8: U5.17@3746.78,3460.06 3746.78,3567.15 3853,3673.37 v1(3853,3681) ; U3.11@4328,3980.49 4328,4052 4382,4106 v1@4393,4106 ; v1@4387,4106 4390,4103 v1(4390,4099)
  Bottom Layer w8: v1@3850,3681 4053,3681 4383,4011 4383,4110 4390,4103 v1(4390,4099)
Z_MAX: J13.1 U3.13 | length 3653.8
  Top Layer w8: U3.13@4228,3980.49 4224,3984.49 4224,4014.63 5026.37,4817 5501,4817 5619,4699 5619,3097.67 J13.1@5789,2927.67
Z_MIN: J14.1 U3.12 | length 4158.2
  Top Layer w8: U3.12@4278,3980.49 4278,4043 5034,4799 5486.91,4799 5601,4684.91 5601,2538.5 J14.1@5789,2350.5
Z_MS1: J4.8 U4.92 | length 2418.7
  Top Layer w8: U4.92@3685.24,2502.74 4309.26,2502.74 4333,2479 ; v1(4869,2641) 4935,2707 4935,3393 5051,3509 J4.8@5201,3509
  Bottom Layer w8: v1@4329,2488 4329,2602 4367,2640 v1@4867,2640
  other v1: 4324,2491
Z_MS2: J4.7 U4.28 | length 3594.8
  Top Layer w8: v1(3010,2614) 3010,2621 3052.61,2621 3052.76,2620.85 ; v1(4838,2792) 4843.82,2792 4917,2865.18 4917,3462 5140,3685 5409,3685 5409,3537 5381,3509 J4.7@5301,3509
  Bottom Layer w8: v1(3010,2614) 3010,2716 3017,2723 3017,2731 3095,2809 3315.57,2809 3323.57,2817 3348.43,2817 3356.43,2809 3795.46,2809 3803.46,2801 4829,2801 v1(4838,2792)
Z_RST: J4.4
Z_SLP: J4.3
Z_STEP: J4.6 U4.77 | length 2726.3
  Top Layer w8: 3722.35,2208.35 3802.7,2128 4197,2128 v1@4214,2145 ; v1(4928,2609) 4930,2607 4953,2630 4953,3279 5083,3409 J4.6@5201,3409
  Bottom Layer w8: v1@4200,2143 4210,2133 4928,2133 v1(4928,2609)
  other v1: 4208,2139
pads on no net: J1.0 J2.0 J3.0 J4.0 J5.0 J5.2 J5.4 J5.6 J5.8 J5.10 J6.4 J6.6 J6.7 J6.8 J6.9 J6.10 J6.11 J7.7 J7.MH J8.4 J8.6 J8.7 J8.8 J8.9 J8.10 J8.11 J9.4 J10.4 J11.4 J12.4 J13.4 J14.4 J15.3 J16.6 J18.0 J19.6 J19.MH1 J19.MH2 J20.0 SW1.G U1.1 U1.5 U1.8 U1.9 U1.10 U1.11 U1.12 U1.29 U1.33 U1.38 U1.42 U1.45 U1.46 U2.16 U4.29 U4.60 U4.61 U4.84 U6.3 U6.4 U6.5 U6.6 U6.8 U6.9 U6.10 U6.11 U6.12 U6.13 U7.4 U8.4 U9.4 Y2.3 Y2.4

## Polygon pours and split planes (outlines as drawn)
GND on Top Layer "Top Layer-No Net" (solid, pour order 7): 0,0 0,5000 6000,5000 6000,0
GND on Bottom Layer "Top Layer-No Net" (solid, pour order 8): 0,0 6000,0 6000,5000 0,5000

## Silkscreen, mask and mechanical layers (free items; w line width, h text height)
Mechanical 1:
  the board outline again, w10

## Text inside footprints (layer, text, board x,y; h text height)
J1: Top Overlay "2" at 5092,4133 h30 r270; Top Overlay "1" at 5417,4119.43 h30 r90; Top Overlay "10" at 5092,4543.28 h30 r270; Top Overlay "9" at 5417,4502 h30 r90
J2: Top Overlay "2" at 5092,2331 h30 r270; Top Overlay "1" at 5417,2317.43 h30 r90; Top Overlay "10" at 5092,2741.28 h30 r270; Top Overlay "9" at 5417,2700 h30 r90
J3: Top Overlay "2" at 5092,1430 h30 r270; Top Overlay "1" at 5417,1416.43 h30 r90; Top Overlay "10" at 5092,1840.28 h30 r270; Top Overlay "9" at 5417,1799 h30 r90
J4: Top Overlay "2" at 5092,3232 h30 r270; Top Overlay "1" at 5417,3218.43 h30 r90; Top Overlay "10" at 5092,3642.28 h30 r270; Top Overlay "9" at 5417,3601 h30 r90
J5: Top Overlay "2" at 5092,529 h30 r270; Top Overlay "1" at 5417,515.43 h30 r90; Top Overlay "10" at 5092,939.28 h30 r270; Top Overlay "9" at 5417,898 h30 r90
J17: Top Overlay "3" at 2671,3573 h40 r90; Top Overlay "1" at 2671,3378 h40 r90
J18: Top Overlay "2" at 4094,4537 h30; Top Overlay "1" at 4107.57,4862 h30 r180; Top Overlay "10" at 3683.72,4537 h30; Top Overlay "9" at 3725,4862 h30 r180
J20: Top Overlay "2" at 2654,447 h30 r180; Top Overlay "1" at 2640.43,122 h30; Top Overlay "10" at 3064.28,447 h30 r180; Top Overlay "9" at 3023,122 h30